# Altium PCB pcb1 (2).PcbDoc
Units mm, origin at the board's own origin, x right, y up, seen from the top; angles counter-clockwise.
Board outline 70.46 x 68.3 mm, 2 copper layers (Top Layer, Bottom Layer); 42 components, 43 nets, 233 pads, 95 vias.
Unrouted connection lines stored in the file: 142.
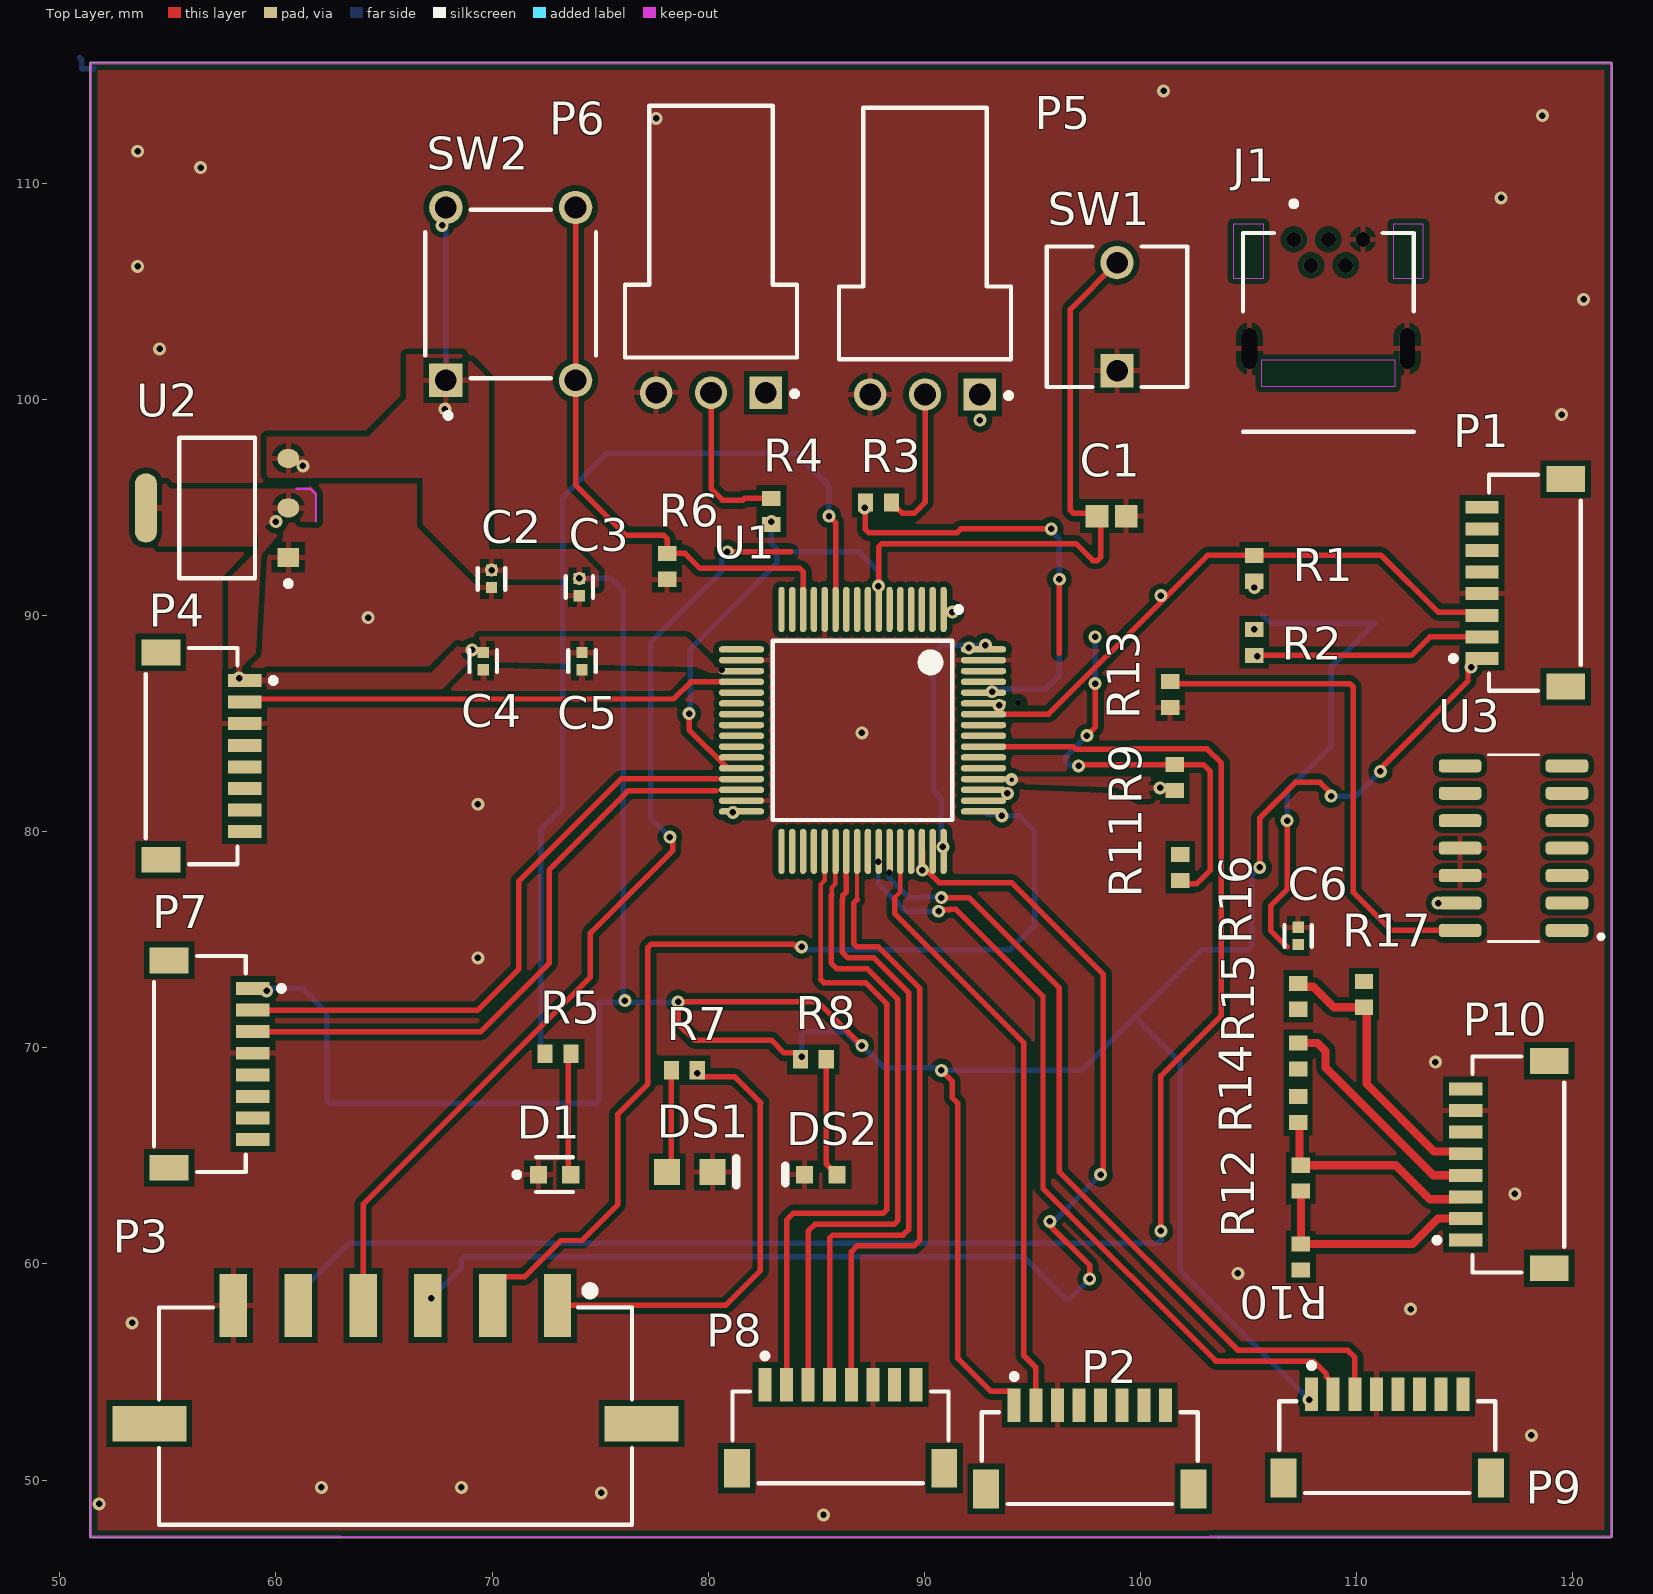
[diagram p0: Top Layer view]
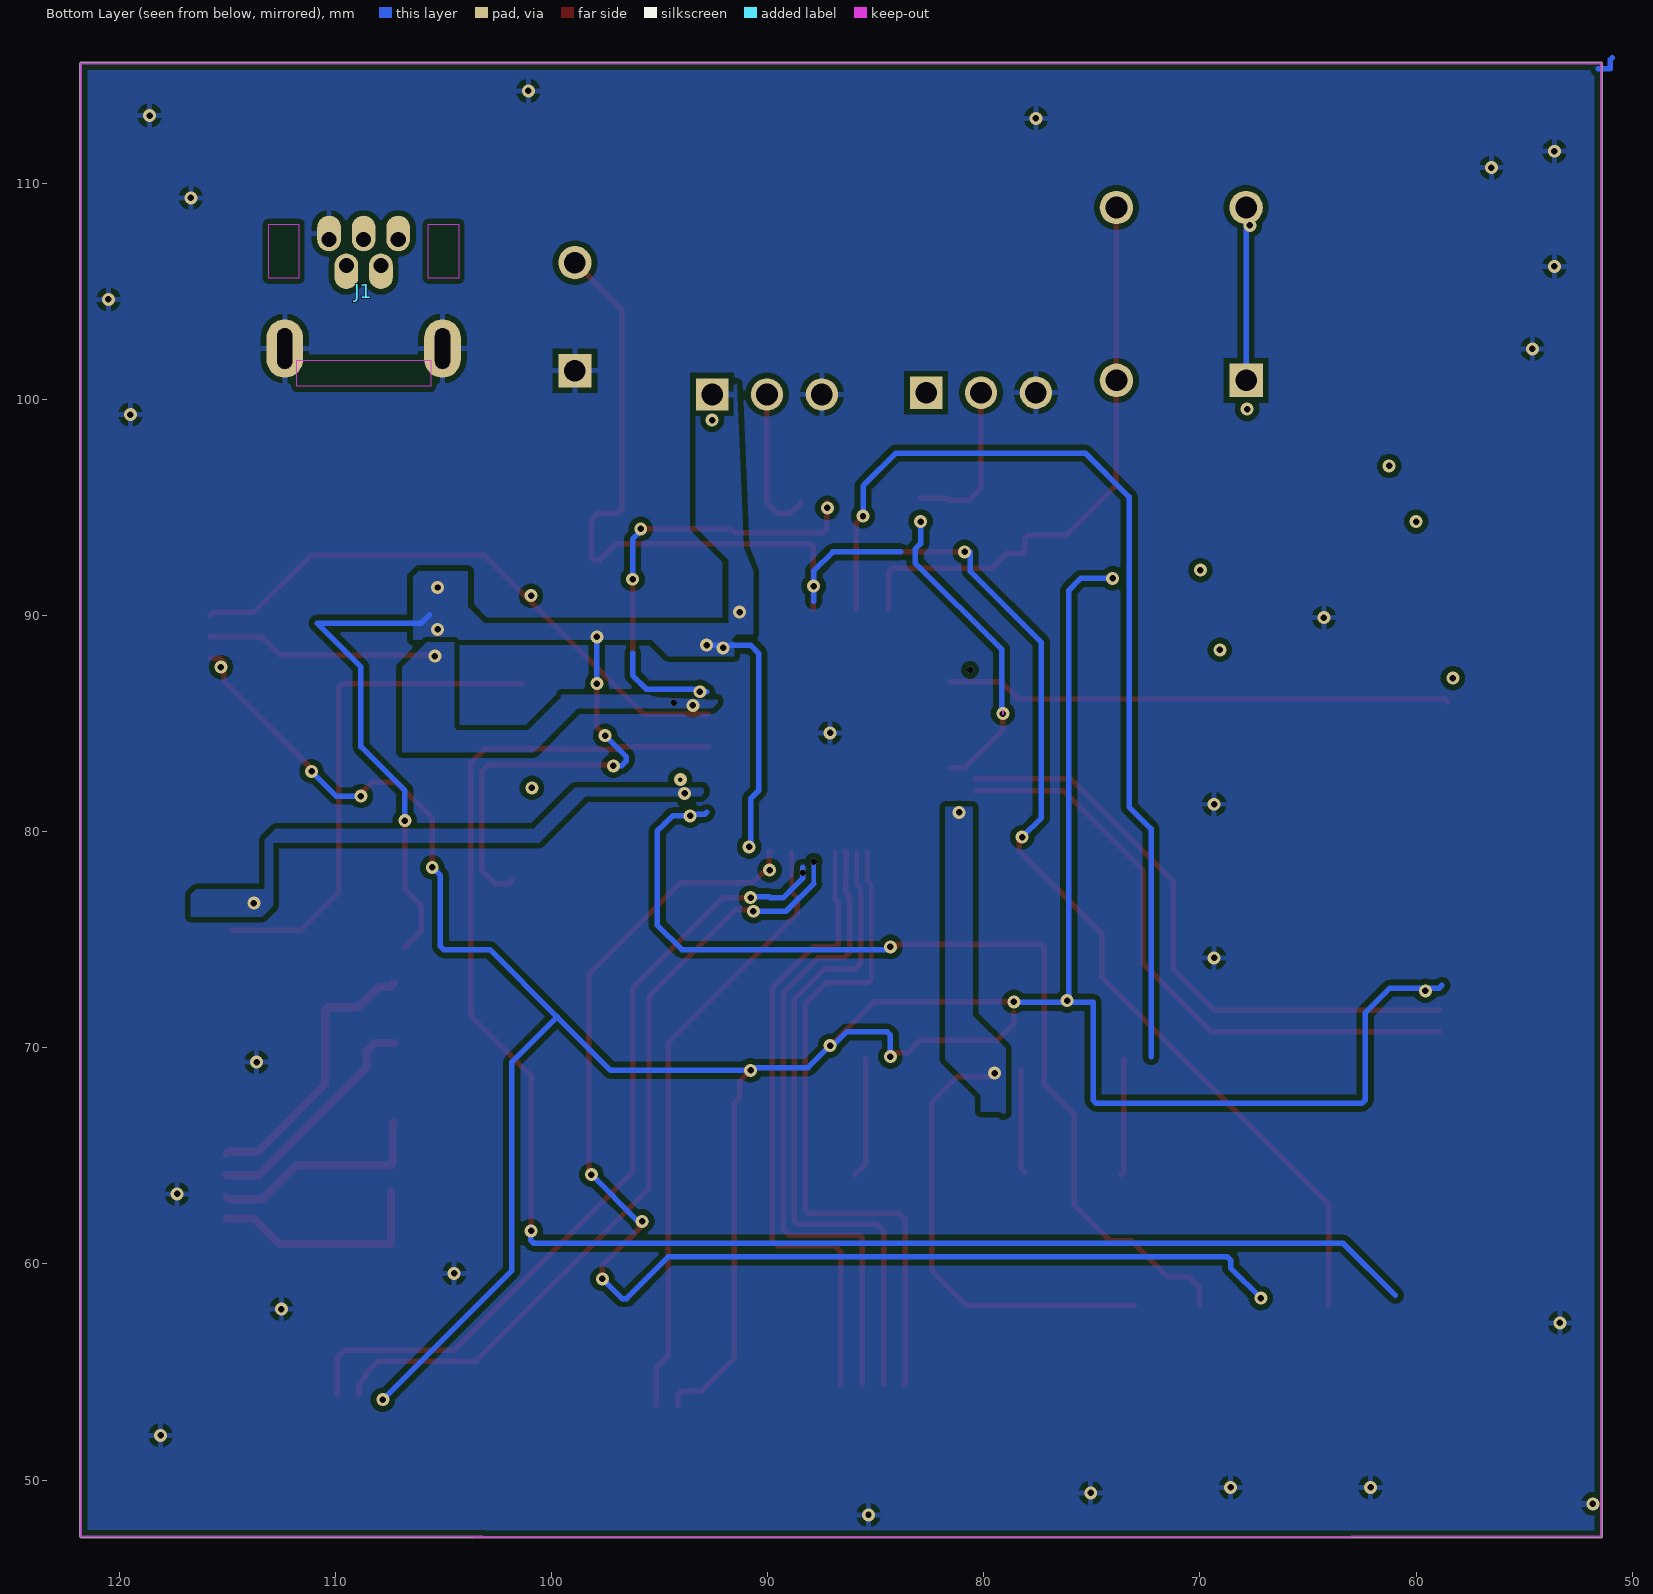
[diagram p1: Bottom Layer view, seen from below]
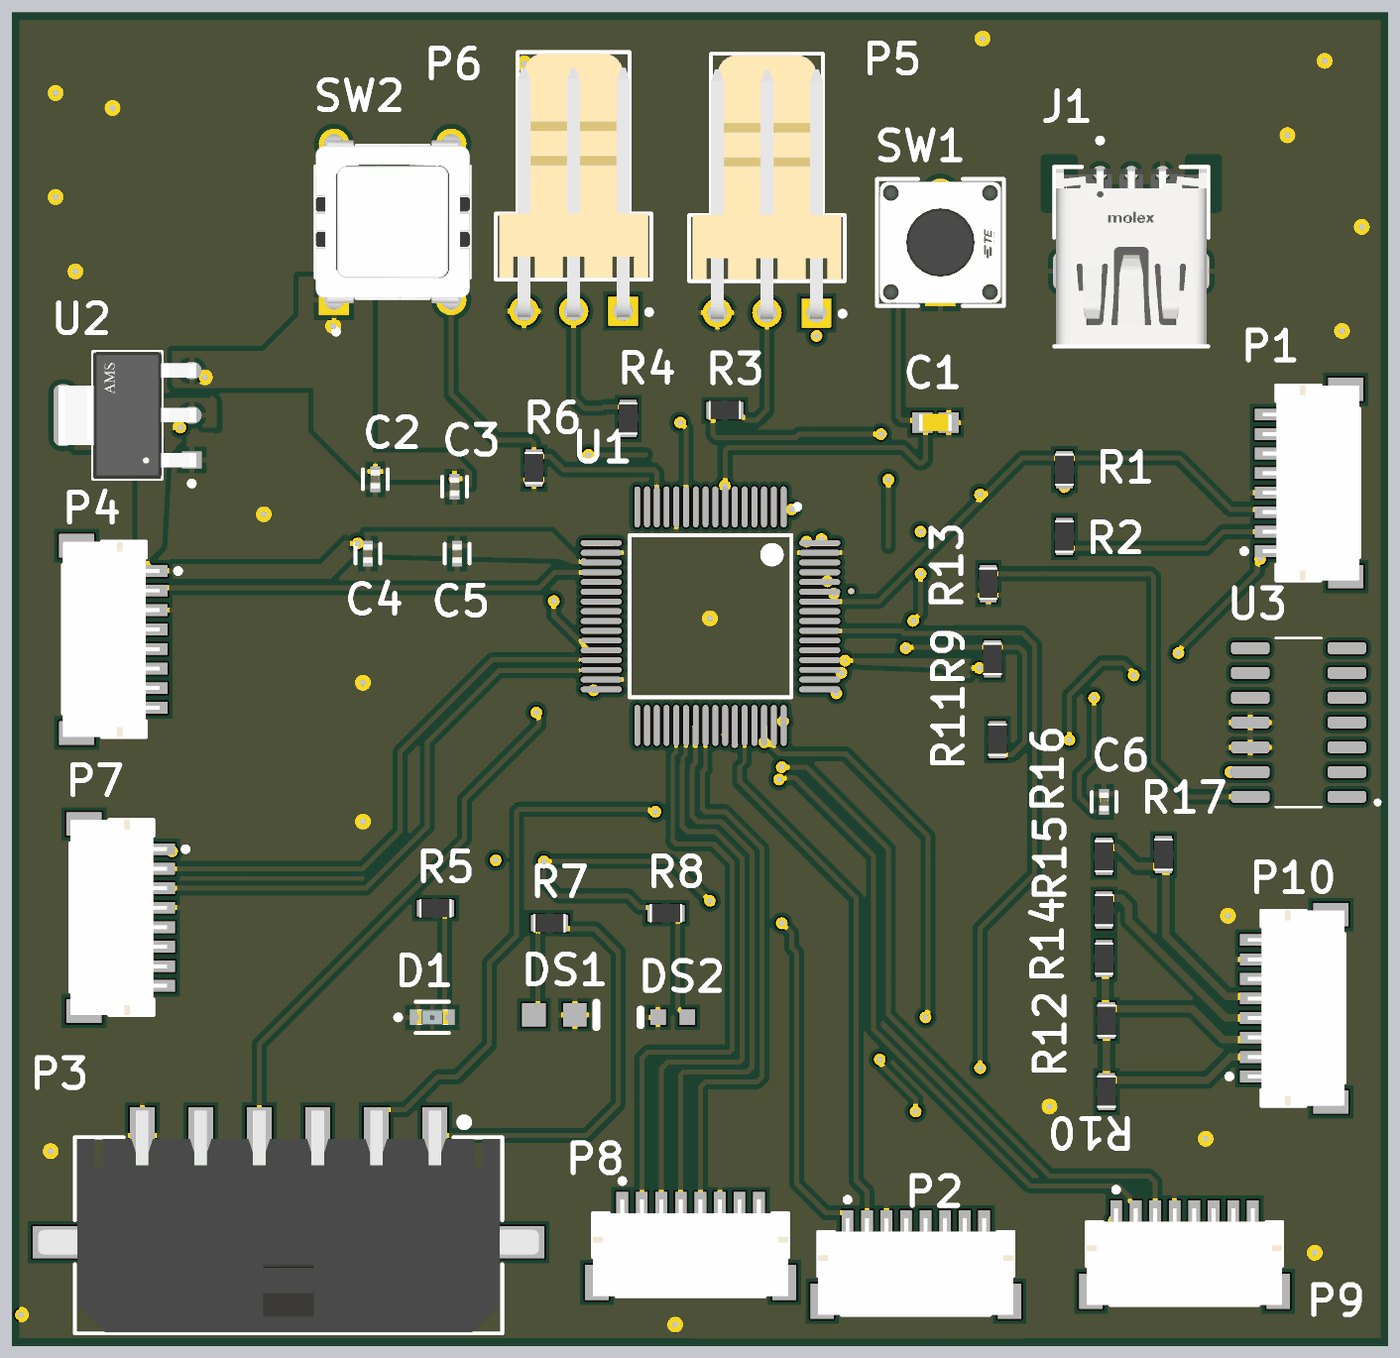
[diagram p2: 3D render of the assembled board from above, using the file's embedded part models]

## Layer stack, top to bottom
Top Solder: solder mask 0.0102, Solder Resist, Dk 3.5
Top Layer: signal copper 0.0356
Dielectric 1: dielectric 0.32, FR-4, Dk 4.8
Bottom Layer: signal copper 0.0356
Bottom Solder: solder mask 0.0102, Solder Resist, Dk 3.5

## Board outline
51.385,47.376 ccw(c51.435,47.376) 51.435,47.326 62.989,47.326 103.634,47.316 ccw(c103.634,47.366) 103.676,47.337 121.793,47.337 ccw(c121.793,47.388) 121.843,47.388 121.843,115.57 ccw(c121.793,115.57) 121.793,115.62 104.87,115.62 67.85,115.62 51.436,115.62 ccw(c51.435,115.57) 51.385,115.57 51.385,64.809

## Design rules (kind name [scope] priority, off if disabled: settings)
Clearance [All] p1: gap=0.254 ignorepadtopadclearanceinfootprint=FALSE except(0: Arc-Hole Track-Hole SMDPad-Hole THPad-Hole Via-Hole Fill-Hole Poly-Hole Region-Hole Text-Hole)
DiffPairsRouting [All] p1: maxlimit=0.254 minlimit=0.254 mostfreqgap=0.254 toplayer_minwidth=0.381 toplayer_maxwidth=0.381 toplayer_prefwidth=0.381 bottomlayer_minwidth=0.381 bottomlayer_maxwidth=0.381 bottomlayer_prefwidth=0.381 maxuncoupledlength=12.7
PolygonConnect [All] p1: connectstyle=Relief reliefconductorwidth=0.254 reliefentries=4 polygonreliefangle="90 Angle" airgapwidth=0.254
RoutingVias [All] p1: holewidth=0.711 width=1.27 viastyle="Through Hole" minholewidth=0.711 minwidth=1.27 maxholewidth=0.711 maxwidth=1.27
SolderMaskExpansion [All] p1: expansion=0.102 istentingtop=FALSE
Width [All] p1: maxlimit=0.254 minlimit=0.254 preferedwidth=0.254
29 further rules are at their usual default settings.

## Classes and differential pairs
differential pair class diff103: RS485_OUTPUT
differential pair class diff102: RS485_INPUT
component class Sheet2: C2 C3 C4 C5 C6 J1 P7 P8 P9 P10 R9 R10 R11 R12 R13 R14 R15 R16 R17 U2 U3
component class Sheet1: C1 D1 DS1 DS2 P1 P2 P3 P4 P5 P6 R1 R2 R3 R4 R5 R6 R7 R8 SW1 SW2 U1
differential pair RS485_OUTPUT: +RS485_OUTPUT_P -RS485_OUTPUT_N
differential pair RS485_INPUT: +RS485_INPUT_P -RS485_INPUT_N

## Components (designator, comment, footprint, x,y, rotation, side; value= is the part's Value field where it differs from the comment)
C1 "CC0603JRNPO9BN101" CAPC1608X90X40ML10T20 98.679,94.615 r180 top
C2 "100nF" FP-C0402-BB-MFG 69.977,91.713 r270 top value="0.10 μF"
C3 "10nF" FP-C0402-BB-MFG 74.041,91.332 r270 top value="0.10 μF"
C4 "10nF" FP-C0402-BB-MFG 69.596,87.903 r270 top value="0.10 μF"
C5 "100nF" FP-C0402-BB-MFG 74.168,87.903 r270 top value="0.10 μF"
C6 "100nF" FP-C0402-BB-MFG 107.315,75.184 r90 top value="0.10 μF"
D1 "LTST-C191TBKT" FP-LTST-C191TBKT-MFG 72.898,64.135 r0 top
DS1 "HSMG-C170" AVAG-HSMX-C170_V 79.155,64.262 r0 top
DS2 "HSMH-C190" AVAG-HSMX-C190_V 85.217,64.135 r180 top
J1 "54819-0519" FP-54819-0519-MFG 108.712,103.124 r0 top
P1 "SM08B-SRSS-TB(LF)(SN)" JST-SM08B-SRSS-TB_V 118.274,91.527 r90 top
P2 "SM08B-SRSS-TB(LF)(SN)" JST-SM08B-SRSS-TB_V 97.671,51.017 r0 top
P3 "662106145021" 662106145021 65.532,52.959 r0 top
P4 "SM08B-SRSS-TB(LF)(SN)" JST-SM08B-SRSS-TB_V 56.097,83.51 r270 top
P5 "61900311021" 61900311021 90.043,107.696 r180 top
P6 "61900311021" 61900311021 80.137,107.78 r180 top
P7 "SM08B-SRSS-TB(LF)(SN)" JST-SM08B-SRSS-TB_V 56.478,69.255 r270 top
P8 "SM08B-SRSS-TB(LF)(SN)" JST-SM08B-SRSS-TB_V 86.132,51.971 r0 top
P9 "SM08B-SRSS-TB(LF)(SN)" JST-SM08B-SRSS-TB_V 111.435,51.525 r0 top
P10 "SM08B-SRSS-TB(LF)(SN)" JST-SM08B-SRSS-TB_V 117.512,64.603 r90 top
R1 "10k" RESC1609X50X30LL8T20 105.283,92.202 r270 top
R2 "10k" RESC1609X50X30LL8T20 105.283,88.773 r270 top
R3 "10k" RESC1609X50X30LL8T20 87.884,95.25 r0 top
R4 "10k" RESC1609X50X30LL8T20 82.931,94.834 r90 top
R5 "10k" RESC1609X50X30LL8T20 73.06,69.723 r0 top
R6 "10k" RESC1609X50X30LL8T20 78.105,92.294 r90 top
R7 "10k" RESC1609X50X30LL8T20 78.902,68.961 r180 top
R8 "10k" RESC1609X50X30LL8T20 84.871,69.469 r0 top
R9 "10k" RESC1609X50X30LL8T20 101.6,82.515 r90 top
R10 "10k" RESC1609X50X30LL8T20 107.442,60.325 r90 top
R11 "10k" RESC1609X50X30LL8T20 101.854,78.359 r90 top
R12 "120R" RESC1609X50X30LL8T20 107.442,63.973 r270 top
R13 "10k" RESC1609X50X30LL8T20 101.39,86.36 r90 top
R14 "10k" RESC1609X50X30LL8T20 107.315,67.148 r270 top
R15 "10k" RESC1609X50X30LL8T20 107.315,69.631 r90 top
R16 "120R" RESC1609X50X30LL8T20 107.315,72.39 r270 top
R17 "10k" RESC1609X50X30LL8T20 110.363,72.482 r270 top
SW1 "FSM2JART" FP-FSM2JART-MFG 98.933,103.848 r90 top
SW2 "ESE20C321" FP-ESE20C321-MFG 70.866,104.902 r90 top
U1 "STM32F107RCT6" STM-LQFP64_M 87.15,84.697 r270 top
U2 "AMS1117-3.3" FP-AMS1117-IPC_C 57.277,94.996 r180 top
U3 "SN65HVD1473D" SOIC127P600X175-14N 117.283,79.248 r180 top

## Footprints (in the part's own frame and the unit in brackets; to place one, negate y for a bottom-side part, rotate by r counter-clockwise, add the part's x,y. Pads: shape width x height; smd on the part's side, far side on the other; paste and mask are expansions set on the pad)
61900311021 [mm] "2.54mm Male Left Angled Header Bottom Locking, 3p"
  rect 1.5x1.5 hole 1: 1(-2.54,7.45)
  round 1.5 hole 1: 2(0,7.45) 3(2.54,7.45)
  silkscreen extent -4,-5.82 3.98,7.62, body extent -3.81,-5.75 3.81,7.77, height 5.83
662106145021 [mm] "3.00mm Male Single Row Angled Header, 6p"
  rect 1.27x2.92 smd: 1(7.5,5.12) 2(4.5,5.12) 3(1.5,5.12) 4(-1.5,5.12) 5(-4.5,5.12) 6(-7.5,5.12)
  rect 3.43x1.65 smd: MP1(-11.395,-0.35) MP2(11.395,-0.35)
  silkscreen extent -10.95,-5.02 10.95,6, body extent -12.82,-4.95 12.82,6.4, height 5.61
AVAG-HSMX-C170_V [mm] "SMD, 2-Leads, Body 2x1.25mm, Height 0.8mm"
  rect 1.2x1.2 smd: 1(-1.05,0) 2(1.05,0)
  silkscreen extent 2.15,-0.63 2.15,0.63, body extent -1,-0.63 1,0.63, height 0.8
AVAG-HSMX-C190_V [mm] "SMD, 2-Leads, Body 1.6x0.8mm, Height 0.9mm"
  rect 0.8x0.8 smd: 1(-0.75,0) 2(0.75,0)
  silkscreen extent 1.65,-0.4 1.65,0.4, body extent -0.8,-0.4 0.8,0.4, height 0.9
CAPC1608X90X40ML10T20 [mm] "Chip Capacitor, 2-Leads, Body 1.7x0.9mm, IPC Low Density"
  rect 1.05x1.05 smd: 1(-0.675,0) 2(0.675,0)
  body extent -0.85,-0.45 0.85,0.45, height 0.9
FP-54819-0519-MFG [mm]
  rrect100% 1.1x1.65 smd far side paste-1000 mask+0: 1(-1.6,4.575) 2(-0.8,2.825) 3(0,4.575) 4(0.8,2.825) 5(1.6,4.575)
  rrect100% 0.7x1.9 hole 1.9 slot 0.7 at 0 deg paste-1000 mask+0: 6(-3.65,-0.75) 7(3.65,-0.75)
  rrect100% 1.7x2.7 smd far side paste-1000 mask+0: 6(-3.65,-0.75) 7(3.65,-0.75)
  Keep-Out Layer region: 3,2.5 4.4,2.5 4.4,5 3,5
  Keep-Out Layer region: -4.4,2.5 -3,2.5 -3,5 -4.4,5
  Keep-Out Layer region: -3.1,-2.5 3.1,-2.5 3.1,-1.3 -3.1,-1.3
  silkscreen extent -3.95,-4.6 3.95,6.07, body extent -4.6,-4.7 4.6,5.5, height 0.25
FP-AMS1117-IPC_C [mm]
  rect 1.004x0.872 smd paste+0 mask+0: 1(-3.295,2.29)
  rrect100% 1.004x0.872 smd paste+0 mask+0: 2(-3.295,0) 3(-3.295,-2.29)
  rrect87% 1.004x3.182 smd paste+0 mask+0: 4(3.295,0)
  silkscreen extent -3.42,-3.25 1.75,3.62, body extent -3.9,-3.35 3.9,3.35, height 0.25
FP-C0402-BB-MFG [mm]
  rect 0.52x0.52 smd paste+0 mask+0: 1(-0.4,0) 2(0.4,0)
  silkscreen extent -0.5,-0.64 0.5,0.64, body extent -0.8,-0.4 0.8,0.4, height 0.25
FP-ESE20C321-MFG [mm]
  rect 1.55x1.55 hole 1 paste-1000 mask+0: A(-4,3)
  round 1.55 hole 1 paste-1000 mask+0: B(-4,-3) C(4,3) D(4,-3)
  silkscreen extent -5.75,-3.95 3.9,3.95, body extent -4.87,-4.05 4.87,4.05, height 0.25
FP-FSM2JART-MFG [mil]
  rect 60.65x60.65 hole 39 paste-39370.1 mask+0: 1(-98.5,0)
  round 60.65 hole 39 paste-39370.1 mask+0: 2(98.5,0)
  silkscreen extent -128,-128 128,128, body extent -133,-132 133,132, height 10
FP-LTST-C191TBKT-MFG [mm]
  rect 0.8x0.8 smd paste+0 mask+0: 1(-0.75,0) 2(0.75,0)
  silkscreen extent -1.87,-0.8 0.85,0.8, body extent -1.25,-0.55 1.25,0.55, height 0.25
JST-SM08B-SRSS-TB_V [mm] "SMD, 8-Leads, Body 10x4.25mm, Pitch 1mm"
  rect 0.6x1.55 smd: 1(-3.5,2.45) 2(-2.5,2.45) 3(-1.5,2.45) 4(-0.5,2.45) 5(0.5,2.45) 6(1.5,2.45) 7(2.5,2.45) 8(3.5,2.45)
  rect 1.2x1.8 smd: MP1(-4.8,-1.425) MP2(4.8,-1.425)
  silkscreen extent -5,-2.12 5,3.9, body extent -5,-2.12 5,2.83, height 2.96
RESC1609X50X30LL8T20 [mm] "Chip Resistor, 2-Leads, Body 1.65x0.95mm, IPC High Density"
  rect 0.7x0.85 smd: 1(-0.6,0) 2(0.6,0)
  body extent -0.82,-0.48 0.82,0.48, height 0.5
SOIC127P600X175-14N [mm]
  rrect50% 1.97x0.6 smd: 1(-2.475,3.81) 2(-2.475,2.54) 3(-2.475,1.27) 4(-2.475,0) 5(-2.475,-1.27) 6(-2.475,-2.54) 7(-2.475,-3.81) 8(2.475,-3.81) 9(2.475,-2.54) 10(2.475,-1.27) 11(2.475,0) 12(2.475,1.27) 13(2.475,2.54) 14(2.475,3.81)
  silkscreen extent -4.15,-4.33 1.17,4.33
STM-LQFP64_M [mm] "Thin QFP, 64-Leads, Body 10x10mm, Pitch 0.5mm, IPC Low Density"
  oval 2.1x0.3 smd: 1(-5.6,3.75) 2(-5.6,3.25) 3(-5.6,2.75) 4(-5.6,2.25) 5(-5.6,1.75) 6(-5.6,1.25) 7(-5.6,0.75) 8(-5.6,0.25) 9(-5.6,-0.25) 10(-5.6,-0.75) 11(-5.6,-1.25) 12(-5.6,-1.75) 13(-5.6,-2.25) 14(-5.6,-2.75) 15(-5.6,-3.25) 16(-5.6,-3.75) 33(5.6,-3.75) 34(5.6,-3.25) 35(5.6,-2.75) 36(5.6,-2.25) 37(5.6,-1.75) 38(5.6,-1.25) 39(5.6,-0.75) 40(5.6,-0.25) 41(5.6,0.25) 42(5.6,0.75) 43(5.6,1.25) 44(5.6,1.75) 45(5.6,2.25) 46(5.6,2.75) 47(5.6,3.25) 48(5.6,3.75)
  oval 0.3x2.1 smd: 17(-3.75,-5.6) 18(-3.25,-5.6) 19(-2.75,-5.6) 20(-2.25,-5.6) 21(-1.75,-5.6) 22(-1.25,-5.6) 23(-0.75,-5.6) 24(-0.25,-5.6) 25(0.25,-5.6) 26(0.75,-5.6) 27(1.25,-5.6) 28(1.75,-5.6) 29(2.25,-5.6) 30(2.75,-5.6) 31(3.25,-5.6) 32(3.75,-5.6) 49(3.75,5.6) 50(3.25,5.6) 51(2.75,5.6) 52(2.25,5.6) 53(1.75,5.6) 54(1.25,5.6) 55(0.75,5.6) 56(0.25,5.6) 57(-0.25,5.6) 58(-0.75,5.6) 59(-1.25,5.6) 60(-1.75,5.6) 61(-2.25,5.6) 62(-2.75,5.6) 63(-3.25,5.6) 64(-3.75,5.6)
  silkscreen extent -5.72,-4.15 4.15,4.58, body extent -5,-5 5,5, height 1.6

## Part data
C1: library part CMP-2100-03594-1, "Chip Capacitor, 100 pF, +/- 5%, 50 V, -55 to 125 degC, 0603 (1608 Metric), RoHS, Tape and Reel", Capacitance=100pF, Case Code (Metric)=1608, Case Code (Imperial)=0603, Dielectric=C0G, Manufacturer=Yageo, Max Operating Temperature=125degC, Min Operating Temperature=-55degC, Package Description="2-Pin Surface Mount Device, Body 1.6 x 0.8 mm", Package Quantity=1, Temperature Coefficient=30ppm/degC, Tolerance=5%, Voltage=50V, Insulation Resistance=100GR, Case/Package=0603, Composition=Ceramic, Datasheet URL=http://www.yageo.com/documents/recent/UPY-GP_NP0_16V-to-50V_14.pdf, Datasheet Version="Rev. 14, 07/2016", Depth=0.8mm, Height=0.8mm, Lead Free=LeadFree, Length=1.6mm, Manufacturer URL=http://www.yageo.com/, Mount=SurfaceMount, Number of Pins=2, Package Reference=0603, Packaging=TapeandReel, Radiation Hardening=No, REACH SVHC=Unknown, RoHSCompliant=True, Termination=SMD/SMT, Thickness=0.035inch, Voltage Rating=50V, Voltage Rating (DC)=50V, Width=0.8mm
C2 C3 C4 C5 C6: library part CMP-2008-02046-2, "CAP CER 0.1UF 10V X5R 0402", Capacitance="0.10 μF", Manufacturer=Kemet, Manufacturer Part Number=C0402C104K8PACTU, Package=C0402-BB, Temperature="-55°C to +125°C", Temperature Characteristic=X5R, Temperature Coefficient=15%, Temperature Range High=+125°C, Temperature Range Low=-55°C, Tolerance=0.1, Voltage Rating="10 V", Automotive=No, Category=Cap, ComponentLink2Description=Datasheet, ComponentLink2URL=https://content.kemet.com/datasheets/KEM_C1002_X7R_SMD.pdf, Device Class L1="Passive Components", Device Class L2=Capacitors, Device Class L3="Ceramic Capacitors", Digikey Description="CAP CER 0.1UF 10V X5R 0402", Height=0.55mm, Lead Free=Yes, Material=Ceramic, Mouser Description="Capacitor 100 nF 10 VDC 0402", Octopart=https://octopart.com/c0402c104k8pactu-kemet-140039, RoHS=TRUE, Ipc Land Pattern Name=CAPC10050X50
D1: library part CMP-22017-000008-1, "LED BLUE CLEAR CHIP SMD", Case Code (Metric)=1608, Case Code (Imperial)=0603, Color=Blue, Forward Current=20mA, Forward Voltage=3.8V, Lens Color=Colorless, Max Operating Temperature=80°C, Max Power Dissipation=75mW, Min Operating Temperature=-20°C, Package Quantity=1, Power Dissipation=76mW, Reverse Voltage=5V, Case/Package=0603, Depth=1.6mm, Dominant Wavelength=475nm, Height=0.55mm, Lead Free="Lead Free", Length=0.8mm, Lens Style=Diffused, Lens Transparency=Clear, Luminous Intensity=180mcd, Mount="Surface Mount", Number of Elements=1, Number of LEDs=1, Number of Pins=2, Packaging="Tape and Reel", Radiation Hardening=No, Test Current=20mA, Viewing Angle=130°, Wavelength=468nm, Width=0.8mm, Illumination Color=Blue
DS1: library part CMP-2000-05062-1, "Chip LED, Green, 2.2 V, -40 to 85 degC, 2-Pin SMD, Pb-Free, Tape and Reel", Forward Current If=20mA, Forward Voltage=2.2V, Forward Voltage VF Max=2.6V, LED Colour=Green, Manufacturer=Avago, Operating Temperature Max=85degC, Operating Temperature Min=-30degC, Operating Temperature Range=-30degCto+85degC, Opto Case Style=SMD, Package Description="2-Pin Surface Mount Device, Body 2 x 1.25 mm, Height 0.8 mm", Package Reference=HSMX-C170, Storage Temperature Min=-40degC, Bulb Size=1.25mmx1.4mm, Datasheet URL=https://datasheet.ciiva.com/29280/180495-da-01-en-chip-led-hsmg-c170-gelb-gruen-29280971.pdf, Datasheet Version=Oct-08, Dominant Wavelength=572nm, Dominant Wavelength Typ=572nm, External Depth=0.8mm, External Length / Height=2mm, External Width=1.25mm, Forward Current If Max=20mA, LED Mounting=SMD, LED Type=Standard, Lens Shape=Rectangular, Light Area Height=1mm, Luminous Intensity=15mcd, Luminous Intensity Min=4mcd, Luminous Intensity Typ=15mcd, Manufacturer URL=http://www.avagotech.com/, Mounting Type=SMD, MSL=MSL2A-4weeks, No. of Pins=2, Opto Mounting Orientation=Top, Packaging=CutTape, Peak Forward Current=20mA, Peak Wavelength=570nm, PIV Max=5V, Storage Temperature Max=85degC, SVHC=NoSVHC(16-Jun-2014), Viewing Angle=170deg, Voltage Vf Typ=2.2V, Wavelength Typ=570nm
DS2: library part CMP-1744-00004-1, "LED Uni-Color Red, 65 mW, 20 mA, -40 to 85 degC, 2-Pin SMD, RoHS, Tape and Reel", Current Rating="1 A", Max Operating Temperature="85 degC", Min Operating Temperature="-30 degC", Package Quantity=2000, ComponentLink1Description="Manufacturer URL", ComponentLink1URL=http://www.avagotech.com/, ComponentLink2Description=Datasheet, ComponentLink2URL=http://docs.avagotech.com/docs/AV02-0551EN, ComponentLink3Description="Package Specification", ComponentLink3URL=http://www.fairchildsemi.com/dwg/MA/MA03D.pdf, Connector Type=USB, Contact Material=Copper, Contact Plating=Gold, DatasheetVersion=Mar-12, Gender=Male, Height="2.8 mm", Lead Pitch="0.65 mm", Length="7.5 mm", Mount="Surface Mount", PackageDescription="2-Pin Surface Mount Device, Body 1.6 x 0.8 mm, Height 0.9 mm", PackageReference=HSMX-C190, Packaging="Tape and Reel", Pins=5, REACH SVHC="No SVHC", RoHSCompliant=true, Width="5.6 mm"
J1: library part CMP-04767-000009-1, "CONN RCPT USB2.0 MINI B 5P R/A", Color=Black, Contact Resistance=50mR, Current Rating=1A, Flammability Rating="UL94 V-0", Max Operating Temperature=50°C, Min Operating Temperature=0°C, Package Quantity=3600, Voltage Rating=30V, Insulation Resistance=100MR, Connector Type=USB, Contact Material="Copper Alloy", Contact Plating=Gold, Data Rate=480Mbps, Depth=9mm, Features=Shielded, Gender=Receptacle, Housing Color=Black, Housing Material=Polyamide, Lead Free="Lead Free", Length=7.7mm, Max Current Rating=1A, Mount="Through Hole", Number of Circuits=5, Number of Contacts=5, Number of Ports=1, Number of Positions=5, Number of Rows=1, Number of Terminals/Pins=5, Orientation="Right Angle", Packaging=Tray, Pitch=0.8mm, Radiation Hardening=No, Series=54819, Termination=Solder, USB Standard="USB 2.0", Voltage Rating (DC)=30V, Width=6.9mm, Working Voltage=30V
P1 P2 P4 P7 P8 P9 P10: library part CMP-2000-07082-1, "Male Header, Pitch 1 mm, 1 x 8 Position, Height 2.95 mm, -25 to 85 degC, RoHS, Tape and Reel", Manufacturer=JST, Package Description="Male Header, Pitch 1 mm, 1 x 8 Position, Height 2.95 mm", Package Reference=SM08B-SRSS-TB, Datasheet URL=http://www.jst-mfg.com/product/pdf/eng/eSR.pdf, Datasheet Version=11/2010, Manufacturer URL=http://www.jst.com/home2.html, Mounting Technology=SurfaceMount, No of Positions=8, Pitch=1mm, Style/Orientation=RightAngleHeader/Plug, Termination=Crimp, Type=ShroudedHeader
P3: library part CMP-1502-00486-1, "SMT Male Header WR-MPC3, with SMT Solder Tabs, Right Angled, Single Row, pitch 3 mm, 6 pins", Contact Resistance=10mOhm, Manufacturer="Wurth Elektronik", Operating Temperature=-40to105degC, Working Voltage=250VAC, Datasheet URL=https://katalog.we-online.de/em/datasheet/6621xx145021.pdf, Gender=Male, Manufacturer URL=http://www.we-online.de, Mounting Technology=SMT, Orientation=RightAngled, Package Reference=662106145021, Packaging=TapeandReel, Part Number=662106145021, Pin Number=6, Pitch=3mm, Publisher=WurthElektronik
P5 P6: library part CMP-1502-00593-1, "Male Bottom Locking Header WR-WTB, THT, Right Angled, pitch 2.54 mm, 1 x 3 position", Contact Resistance=20mOhm, Manufacturer="Wurth Elektronik", Operating Temperature=-40to105degC, Working Voltage=250VAC, Datasheet URL=https://katalog.we-online.de/em/datasheet/6190xx11021.pdf, Gender=Male, Manufacturer URL=http://www.we-online.de, Mounting Technology=THT, Orientation=RightAngled, Package Reference=61900311021, Packaging=Bag, Part Number=61900311021, Pitch=2.54mm, Position=1x3, Publisher=WurthElektronik
R1 R2 R3 R4 R5 R6 R7 R8 R9 R10 R11 R12 R13 R14 R15 R16 R17: library part CMP-1666-00005-4, "Chip Resistor, 10 KOhm, +/- 1%, 100 mW, -55 to 155 degC, 0603 (1608 Metric), RoHS, Tape and Reel", Manufacturer="Vishay Semiconductor", Max Operating Temperature="155 degC", Min Operating Temperature="-55 degC", Package Quantity=5000, Voltage Rating="75 V", ComponentLink1Description="Manufacturer URL", ComponentLink1URL=http://www.vishay.com/, ComponentLink2Description=Datasheet, ComponentLink2URL=https://datasheet.ciiva.com/11809/0900766b80d98afc-11809037.pdf, DatasheetVersion=06/2012, Height="0.45 mm", Length="1.55 mm", Mounting Technology="Surface Mount", PackageDescription="2-Pin Surface Mount Device, Body 1.575 x 0.85 mm", PackageReference=0603, Packaging="Tape and Reel", REACH SVHC=Unknown, RoHSCompliant=true
SW1: library part CMP-03407-000009-1, "SWITCH TACTILE SPST-NO 0.05A 12V", Contact Current Rating=50mA, Contact Resistance=100mR, Max Operating Temperature=105°C, Max Voltage Rating (DC)=12V, Min Operating Temperature=-35°C, Operating Force=260gf, Package Quantity=1000, Actuator Length=0.7mm, Actuator Material=Resin, Actuator Type=Standard, Contact Material="Copper Alloy", Contact Plating=Silver, Current Rating=50mA, Electrical Life=100000Cycles, ELV=Compliant, Lead Free="Lead Free", Mount="Through Hole", Orientation=Straight, Packaging="Tape and Reel", REACH SVHC="No SVHC", RoHS Compliant=Yes, Series=FSMJRT, Switch Function=Off-Mom, Termination=Solder, Throw Configuration=SPST, Type=Switch, Voltage Rating (DC)=12V, Illumination Type=Non-Illuminated
SW2: library part CMP-05613-000002-1, "SWITCH PUSH SPST-NO 0.1A 14V", Contact Current Rating=100mA, Max Operating Temperature=80°C, Max Voltage Rating (DC)=14V, Min Operating Temperature=-30°C, Operating Force=4N, Package Quantity=1200, Actuator Type="Square, Button", Current Rating=100mA, Lead Free="Lead Free", Mount="Through Hole", Orientation=Straight, Packaging=Bulk, Radiation Hardening=No, REACH SVHC="No SVHC", RoHS Compliant=Yes, Series=ESE20C, Switch Function=Off-Mom, Termination="PC Pin", Throw Configuration=SPST, Voltage Rating (DC)=14V
U1: library part CMP-0237-00079-3, "ARM Cortex-M3 32-bit MCU, 256 KB Flash, 64 KB Internal RAM, 51 I/Os, 64-pin LQFP, -40 to 85 degC, Tray", Operating Frequency(F) (Processor speed) (MHz)=72, Supply Voltage(Vcc) min (V)=2, I/Os (High Current)=51, A/D Converter="2x12-bit (16 Channel)", ComponentLink1Description="Manufacturer URL", ComponentLink1URL=http://www.st.com/web/en/home.html, ComponentLink2Description=Datasheet, ComponentLink2URL=http://www.st.com/st-web-ui/static/active/en/resource/technical/document/datasheet/CD00220364.pdf, ComponentLink3Description="Package Specification", ComponentLink3URL=http://www.st.com/st-web-ui/static/active/en/resource/technical/document/datasheet/DM00037051.pdf, Core="ARM Cortex-M3", D/A Converter="2x12-bit (2 Channel)", DatasheetVersion="Rev. 6", FLASH Size (Prog) (kB)=256, Mounting Technology="Surface Mount", PackageDescription="64-Pin Low Profile Quad Flat Package, 10 x 10 mm Body, 0.5 mm Pitch", PackageReference=LQFP64, PackageVersion="Rev. 4, 06/2013", Packing=Tray, PartNumber=STM32F107RCT6, Internal RAM Size (kB)=64
U2: library part CMP-209535-000001-1, "LDO Voltage Regulators 1A, 3.3V", Dropout Voltage=1.1V, Manufacturer="Advanced Monolithic Systems", Max Junction Temp=+125°C, Max Power Dissipation=1.2W, Max Supply Voltage=15V, Nominal Supply Current=5mA, Output Current=1A, Output Voltage=3.3V, Package=AMS1117, Temperature="-40°C to +125°C", Temperature Range Low=-40°C, Automotive=No, Category=IC, ComponentLink2Description=Datasheet, ComponentLink2URL=http://www.advanced-monolithic.com/pdf/ds1117.pdf, Device Class L1="Integrated Circuits (ICs)", Device Class L2="Power Management ICs", Device Class L3="Voltage Regulators - Linear", Height=1.8mm, Lead Free=Yes, Manufacturer Part Number=AMS1117-3.3, Number Of Outputs=1, Octopart=https://octopart.com/ams1117-3.3-advanced+monolithic+systems-25899300, Output Type=Fixed, RoHS=TRUE, Standoff Height=0.64mm, Temperature Range High=+125°C, Ipc Land Pattern Name=SOT229P700X180-4

## Via types
v1: diameter 0.6, hole 0.3, Top Layer to Bottom Layer, 85 vias
v2: diameter 0.7, hole 0.7, Top Layer to Bottom Layer, 5 vias
v3: diameter 0.3, hole 0.3, Top Layer to Bottom Layer, 4 vias
v4: diameter 0.6, hole 0.2, Top Layer to Bottom Layer, 1 vias

## Nets (pads, with @x,y where several pads share a name; then routed paths per layer and width w, separated by ;. In a path a pad name is that pad's centre, name@x,y a point inside that pad or via, vN(x,y) a via of type N, cw(c..) or ccw(c..) an arc to the next point about the centre after c; other vN are vias at no path point)
3.3V: R9.2 R11.1 | length 16.9
  Top Layer w0.254: v1(97.155,83.058) 97.212,83.115 R9.2 102.94,83.115 103.251,82.804 103.251,78.232 102.616,77.597 102.016,77.597 R11.1 ; 97.663,84.582 97.917,84.836 97.917,86.868
  Bottom Layer w0.254: 96.562,83.27 96.562,83.481 97.536,84.455 ; 96.774,83.058 v1(97.155,83.058)
  other v1: 92.583,99.06
3V3: C4.1 C5.1 C6.1 P3.1 P4.1 P5.1 P6.1 R1.2 R2.1 R7.1 U1.1 U1.13 U1.19 U1.32 U1.48 U1.64 U2.2 U2.4 | length 51.5
  Top Layer w0.254: P3.1 80.812,58.079 82.423,59.69 82.423,67.437 82.445,67.459 81.241,68.663 79.673,68.663 v1(79.502,68.834)
  Bottom Layer w0.254: v1@90.932,79.248 90.805,79.375 90.805,81.534 90.424,81.915 90.424,88.265 90.805,88.646 v1(92.837,88.646) ; v1(97.917,86.868) v1(97.917,89.027) ; 105.664,90.043 106.045,89.662 110.871,89.662 108.839,87.63 108.839,83.947 106.807,81.915 v1(106.807,80.518)
  other v1: 90.868,79.311 81.153,80.899 58.293,87.122 69.082,88.43 92.075,88.519 105.283,89.373 91.313,90.17 105.283,91.313 59.991,94.361
  other v3: 80.645,87.503
+5: C2.1 C3.1 P1.1 P2.1 P7.1 P9.1 R8.1 SW2.A SW2.C U2.3 | length 153.1
  Top Layer w0.254: 78.613,71.628 78.613,71.12 79.375,70.358 82.931,70.358 83.522,69.767 84.048,69.767 84.271,69.544 R8.1 ; v1@78.74,72.136 85.09,72.136 ; v1(90.805,68.961) 91.313,68.453 91.313,67.691 91.567,67.437 91.567,55.626 93.078,54.115 93.998,54.115 94.171,53.942 P2.1 ; v1(105.537,78.359) 105.537,80.645 107.188,82.296 108.331,82.296 108.966,81.661 ; v1@110.998,82.804 115.176,86.982 115.176,87.854 115.349,88.027 P1.1
  Bottom Layer w0.254: 58.801,72.898 58.928,72.771 61.214,72.771 62.357,71.628 62.357,67.586 62.506,67.437 74.803,67.437 74.952,67.586 74.952,72.114 v1@76.222,72.114 ; v1(67.866,100.902) SW2.C ; v1(74.041,91.732) 75.527,91.732 76.073,91.186 76.073,72.263 v1@76.222,72.114 ; v1(78.613,72.136) 78.591,72.114 v1@76.222,72.114 ; v1(84.328,69.596) 84.328,70.59 84.477,70.739 86.36,70.739 87.058,70.04 ; 87.122,70.104 88.138,69.088 v1@90.678,69.088 ; v1(90.805,68.961) 97.282,68.961 99.758,71.438 ; v1(105.537,78.359) 105.156,77.978 105.156,74.698 105.007,74.549 102.87,74.549 99.758,71.438 ; v1@107.95,53.594 101.854,59.69 101.854,69.342 99.758,71.438
  other v1: 107.823,53.721 76.147,72.189 59.563,72.644 111.125,82.804 115.316,87.63 69.977,92.113 61.241,96.938 67.818,99.568 67.691,108.077
BAR30_SCL: P1.3 R1.1 U1.58 | length 27.3
  Top Layer w0.254: U1.58 95.762,85.447 101.106,90.791 103.117,92.802 R1.1 111.16,92.802 113.792,90.17 115.681,90.17 P1.3
  other v1: 100.965,90.932
BAR30_SDA: P1.2 R2.2 U1.59 | length 10.9
  Top Layer w0.254: R2.2 112.557,88.173 113.411,89.027 P1.2
  other v1: 93.472,85.852 105.41,88.138
  other v3: 94.361,85.979
BOOT0: R3.1 U1.60 | length 20.2
  Top Layer w0.254: R3.1 87.284,94.996 87.284,94.002 87.433,93.853 91.526,93.853 91.699,94.026 v1(95.885,94.026) ; 96.266,88.265 96.266,91.694
  Bottom Layer w0.254: v1@93.271,86.614 95.631,86.614 96.266,87.249 96.266,88.265 ; v1(95.885,94.026) 95.885,93.932 96.266,93.551 96.266,91.694
  other v1: 93.144,86.487 87.249,94.996
BOOT1: R4.1 U1.28 | length 14.7
  Top Layer w0.254: v1@79.121,85.598 v1(79.121,85.471) 79.121,84.725 80.868,82.978 81.519,82.978 U1.28
  Bottom Layer w0.254: v1(79.121,85.471) 79.187,85.537 79.187,88.458 83.185,92.456 83.185,93.091 82.931,93.345 v1(82.931,94.361)
ESC1: P8.2 U1.37 | length 31.5
  Top Layer w0.2: 85.217,73.174 85.217,77.564 85.4,77.747 U1.37
  Top Layer w0.254: P8.2 83.632,62.042 83.947,62.357 88.116,62.357 88.265,62.506 88.265,72.053 87.293,73.025 85.366,73.025 85.217,73.174
ESC2: P8.3 U1.38 | length 30.7
  Top Layer w0.2: 85.725,77.089 85.725,77.43 85.888,77.593 85.888,78.151 85.881,78.158 U1.38@85.881,79.097
  Top Layer w0.254: P8.3 84.632,61.518 84.963,61.849 88.624,61.849 88.773,61.998 88.773,72.263 87.376,73.66 85.974,73.66 85.698,73.936 85.698,77.062 85.725,77.089
ESC3: P8.4 U1.39 | length 30.2
  Top Layer w0.254: P8.4 85.632,61.192 85.781,61.341 89.027,61.341 89.281,61.595 89.281,72.561 87.674,74.168 86.487,74.168 86.206,74.449 86.206,76.852 86.233,76.879 86.233,77.045 86.389,77.201 86.389,77.957 86.369,77.977 86.369,79.066 U1.39
ESC4: P8.5 U1.40 | length 29.4
  Top Layer w0.2: 86.897,76.864 U1.40@86.897,79.097
  Top Layer w0.254: P8.5 86.632,60.561 86.904,60.833 89.535,60.833 89.789,61.087 89.789,72.771 87.884,74.676 86.89,74.676 86.741,74.825 86.741,76.708 86.897,76.864
GND: C1.1 C2.2 C3.2 C4.2 C5.2 C6.2 D1.1 DS1.2 DS2.2 J1.5 J1.6 J1.7 P1.4 P2.3 P3.6 P4.3 P5.3 P6.3 P7.4 P8.6 P9.4 P10.7 R6.1 R13.1 SW1.1 U1.12 U1.18 U1.31 U1.47 U1.63 U2.1 U3.11 U3.12
  other v1: 85.344,48.387 51.816,48.895 75.057,49.403 62.103,49.657 68.58,49.657 118.11,52.07 53.34,57.277 112.522,57.912 104.521,59.563 117.348,63.246 113.665,69.342 69.342,74.168 69.342,81.28 87.122,84.582 64.262,89.916 119.507,99.314 54.61,102.362 120.523,104.648 53.594,106.172 116.713,109.347 56.515,110.744 53.594,111.506 77.597,113.03 118.618,113.157 101.092,114.3
  other v2: 110.312,107.424
JETSON_RX: P9.3 U1.43 | length 37.2
  Top Layer w0.254: v1@90.932,76.962 92.075,76.962 96.266,72.771 96.266,64.262 104.521,56.007 109.601,56.007 109.935,55.673 P9.3
  Bottom Layer w0.254: 88.392,77.851 89.281,76.962 89.893,76.962 ; 89.939,77.008 v1@90.805,77.008
  other v1: 90.805,76.962
  other v3: 88.392,78.105
JETSON_TX: P9.2 U1.42 | length 37.5
  Top Layer w0.254: v1(90.667,76.327) 90.734,76.393 91.196,76.393 91.221,76.419 91.475,76.419 95.504,72.39 95.504,63.5 103.505,55.499 108.025,55.499 108.616,54.908 108.616,54.769 108.935,54.45 P9.2
  Bottom Layer w0.2: 87.884,77.597 v3(87.884,78.613)
  Bottom Layer w0.254: 87.884,77.597 89.154,76.327 v1(90.667,76.327)
NetD1_2: D1.2 R5.2 | length 5.4
  Top Layer w0.254: R5.2@73.533,69.469 73.533,64.25 D1.2
NetDS1_1: DS1.1 R7.2 | length 4.8
  Top Layer w0.254: DS1.1 78.302,64.459 R7.2
NetDS2_1: DS2.1 R8.2 | length 5.5
  Top Layer w0.254: R8.2 85.471,64.631 DS2.1
NetP5_2: P5.2 R3.2 | length 7
  Top Layer w0.254: R3.2 88.484,95.175 88.707,94.952 88.782,94.952 88.992,94.742 89.535,94.742 90.043,95.25 P5.2
NetP6_2: P6.2 R4.2 | length 7.5
  Top Layer w0.254: P6.2 80.137,95.885 80.667,95.355 81.61,95.355 81.689,95.434 R4.2
NetR10_1: R10.1
NetR11_2: R11.2
NetR13_2: R13.2 U3.14 | length 23.7
  Top Layer w0.254: R13.2@101.384,86.868 109.706,86.868 109.855,86.719 109.855,77.216 111.633,75.438 U3.14
NetR14_1: R14.1
NetR15_1: R15.1
NetR17_1: R17.1
NRST: C1.2 P3.4 SW1.2 U1.7 | length 80.8
  Top Layer w0.254: P3.4 64.032,62.762 74.549,73.279 74.549,75.311 78.359,79.121 v1@78.359,79.756 ; 80.645,92.964 83.82,92.964 ; U1.7 87.9,91.376 87.9,93.196 88.049,93.345 97.028,93.345 97.812,92.561 98.022,92.561 98.171,92.71 98.171,94.448 C1.2 97.877,94.742 96.923,94.742 96.774,94.891 96.774,104.191 SW1.2
  Bottom Layer w0.254: v1(78.232,79.756) 77.343,80.645 77.343,88.773 80.645,92.075 80.645,92.964 ; 83.853,92.964 86.995,92.964 87.884,92.075 87.884,90.678
  other v1: 87.884,91.376
POT: P4.2 U1.20 | length 23.4
  Top Layer w0.254: P4.2 58.689,86.152 78.405,86.152 79.2,86.947 U1.20
RS485_INPUT_N: P10.3 R12.1 R14.2 | length 10.3
  Top Layer w0.381: R14.2 107.379,66.484 107.379,64.637 R12.1 111.83,64.573 113.411,62.992 113.792,62.992 113.794,62.994 114.953,62.994 P10.3
RS485_INPUT_P: P10.2 R10.2 R12.2 | length 10.6
  Top Layer w0.381: R12.2 R10.2 112.614,60.925 113.792,62.103 P10.2
RS485_OUTPUT_N: P10.5 R16.1 R17.2 | length 13
  Top Layer w0.381: R16.1 107.475,72.83 108.018,72.83 108.966,71.882 R17.2 110.49,71.755 110.49,68.326 113.604,65.212 114.953,65.212 P10.5
RS485_OUTPUT_P: P10.4 R15.2 R16.2 | length 10.7
  Top Layer w0.381: R15.2 108.204,70.231 108.585,69.85 108.585,69.088 113.57,64.103 P10.4
RS485_RX: R9.1 U1.52
  other v1: 100.921,82.042
  other v4: 94.056,82.415
RS485_TX: U1.51 U3.13
  other v1: 113.792,76.708 93.853,81.788
SERVO_PWM: P2.2 U1.44 | length 28.4
  Top Layer w0.2: 88.646,76.962 88.9,77.216 U1.44
  Top Layer w0.254: 88.646,76.962 88.646,76.2 94.615,70.231 94.615,55.753 95.171,55.197 P2.2
SONAR_RX: P7.3 U1.30 | length 28.6
  Top Layer w0.254: P7.3 69.485,70.755 72.644,73.914 72.644,78.232 76.327,81.915 80.391,81.915
SONAR_TX: P7.2 U1.29 | length 28.3
  Top Layer w0.254: P7.2 69.342,71.755 71.247,73.66 71.247,77.724 75.978,82.455 80.399,82.455
SWCLK: P3.2 U1.49 | length 46
  Top Layer w0.254: P3.2 70.032,58.904 70.54,59.412 71.517,59.412 73.192,61.087 74.168,61.087 75.819,62.738 75.819,66.929 77.216,68.326 77.216,74.654 77.365,74.803 83.947,74.803 v1@84.074,74.676
  Bottom Layer w0.254: v1@84.328,74.549 93.98,74.549 95.123,75.692 95.123,80.032 94.764,80.391 94.412,80.743 v1(93.599,80.743) ; 92.837,80.899 92.927,80.809 v1@93.509,80.809 ; v1@93.509,80.809 93.533,80.809 v1(93.599,80.743) ; v1@93.509,80.809 93.575,80.743 v1(93.599,80.743)
  other v1: 84.328,74.676
SWDIO: P3.3 U1.46 | length 58.7
  Top Layer w0.254: U1.46 89.931,79.066 89.931,78.415 90.703,77.643 94.061,77.643 98.298,73.406 98.298,64.135 v1@98.171,64.008 ; 95.631,61.976 97.663,59.944
  Bottom Layer w0.254: v1(67.183,58.42) 68.58,59.817 68.58,60.176 ; 68.729,60.325 94.615,60.325 96.542,58.398 ; 96.012,61.976 v1(98.171,64.135) ; 96.752,58.398 97.663,59.309
  other v1: 89.916,78.232
SWO: P3.5 U1.55 | length 75.3
  Top Layer w0.254: U1.55 96.901,83.947 97.028,83.82 99.592,83.82 99.618,83.846 103.098,83.846 103.759,83.185 103.759,71.501 100.965,68.707 v1@100.965,61.722
  Bottom Layer w0.254: 60.96,58.547 63.373,60.96 100.838,60.96 100.987,61.109 v1@100.987,61.319
  other v1: 100.965,61.531
USER_BUTTON: R6.2 SW2.B SW2.D U1.14 | length 27.2
  Top Layer w0.254: SW2.D SW2.B 73.866,96.06 76.2,93.726 77.956,93.726 78.105,93.577 R6.2 78.937,92.894 79.629,92.202 84.251,92.202 84.4,92.053 U1.14
USER_LED: R5.1 U1.11 | length 45.8
  Top Layer w0.254: v1(85.598,94.615) 85.9,94.313 U1.11
  Bottom Layer w0.254: 72.263,69.596 72.263,80.137 73.279,81.153 73.279,95.504 75.311,97.536 84.074,97.536 85.471,96.139 ; v1(85.598,94.615) 85.598,96.012
VBUS: J1.1
  other v2: 107.112,107.424
VDD: P8.1
pads on no net: J1.2 J1.3 J1.4 P1.5 P1.6 P1.7 P1.8 P1.MP1 P1.MP2 P2.4 P2.5 P2.6 P2.7 P2.8 P2.MP1 P2.MP2 P3.MP1 P3.MP2 P4.4 P4.5 P4.6 P4.7 P4.8 P4.MP1 P4.MP2 P7.5 P7.6 P7.7 P7.8 P7.MP1 P7.MP2 P8.7 P8.8 P8.MP1 P8.MP2 P9.5 P9.6 P9.7 P9.8 P9.MP1 P9.MP2 P10.1 P10.6 P10.8 P10.MP1 P10.MP2 U1.2 U1.3 U1.4 U1.5 U1.6 U1.8 U1.9 U1.10 U1.15 U1.16 U1.17 U1.21 U1.22 U1.23 U1.24 U1.25 U1.26 U1.27 U1.33 U1.34 U1.35 U1.36 U1.41 U1.45 U1.50 U1.53 U1.54 U1.56 U1.57 U1.61 U1.62 U3.1 U3.2 U3.3 U3.4 U3.5 U3.6 U3.7 U3.8 U3.9 U3.10
copper on no net: | length 16.8
  Top Layer w0.254: 85.09,72.136 v1@87.249,69.977 ; v1(97.663,59.309) 97.663,59.944 ; 106.807,74.676 106.045,75.438 106.045,76.581 106.807,77.343 106.807,80.518
  Bottom Layer w0.254: 50.927,115.824 51.004,115.747 51.004,115.316 51.153,115.316 51.562,115.316 ; 68.58,60.176 68.729,60.325 ; 85.471,96.139 85.598,96.012 ; 88.392,77.851 88.392,78.359 ; 89.893,76.962 89.939,77.008 ; 92.837,86.487 93.144,86.487 93.271,86.614 ; v1@95.631,61.976 v1@96.012,61.976 ; 96.542,58.398 96.752,58.398 ; 96.562,83.27 96.774,83.058 ; 100.965,61.722 100.965,61.341 100.987,61.319 ; v1(108.839,81.661) 109.982,81.661 111.125,82.804
  other v1: 95.822,61.976 87.122,70.104 97.536,84.455 96.266,91.694 80.899,92.964
  other v2: 107.912,106.224 109.512,106.224 108.712,107.424

## Polygon pours and split planes (outlines as drawn)
GND on Top Layer "GND_L01_P019" (solid, pour order 19): 51.308,115.824 51.562,115.57 121.793,115.57 121.793,47.625 121.285,47.117 121.158,47.244 51.308,47.244 51.308,115.062 51.435,115.189
RS485_RX on Top Layer "RS485_RX_L01_P017" (solid, pour order 17): 92.456,82.677 92.456,82.296 98.933,82.042 99.949,81.534 102.362,81.534 102.108,81.788 102.108,82.55 92.964,82.55 92.623,82.891 92.623,82.574
+5 on Top Layer "+5_L01_P016" (solid, pour order 16): 68.834,100.203 68.834,102.108 66.04,102.108 66.04,100.076 64.262,98.298 59.563,98.298 59.563,96.52 59.69,96.393 66.802,96.393 66.802,94.234 69.342,91.694 73.533,91.694 73.914,91.313 74.93,91.313 74.93,92.075 73.914,93.091 69.85,93.091 69.85,100.965 68.707,102.108
3V3 on Top Layer "3V3_L01_P015" (solid, pour order 15): 61.849,95.631 61.595,95.885 59.182,95.885 59.182,93.091 57.785,91.694 57.785,86.614 67.691,86.614 68.961,87.884 79.438,87.63 79.756,87.503 80.391,87.249 82.677,87.249 82.677,87.63 82.55,87.757 80.264,87.757 78.994,89.027 68.834,89.027 67.183,87.376 58.42,87.376 58.293,87.503 59.055,88.265 59.309,92.837 61.595,95.377 61.849,95.377
3V3 on Top Layer "3V3_L01_P009" (solid, pour order 9): 54.61,96.52 54.356,96.774 53.34,96.774 53.34,93.599 53.721,93.218 58.928,93.218 58.928,93.599 59.69,94.361 61.849,94.361 61.849,95.758 61.595,96.012 61.468,95.885 55.118,95.885 54.229,96.774
GND on Bottom Layer "NONET_L02_P022" (solid, pour order 22): 51.611,115.951 121.158,115.951 121.666,115.443 121.666,47.371 51.562,47.371 51.181,47.752 51.258,47.829 51.258,116.167
3V3 on Bottom Layer "3V3_L02_P006" (solid, pour order 6): 93.345,101.092 91.694,101.092 91.44,100.838 91.123,93.154 90.678,92.075 90.678,89.154 91.44,89.154 91.694,88.9 91.567,88.773 91.567,88.138 94.615,88.138 95.377,88.9 106.426,88.9 106.426,91.821 106.172,92.075 103.886,92.075 103.886,90.424 103.124,89.662 91.821,89.662 91.821,92.583 93.345,94.107
3V3 on Bottom Layer "3V3_L02_P018" (solid, pour order 18): 81.788,81.153 80.518,81.153 80.518,71.501 78.994,69.977 78.994,66.802 79.248,67.056 80.137,67.056 80.137,67.818 81.788,69.469
RS485_TX on Bottom Layer "RS485_TX_L02_P002" (solid, pour order 2): 93.091,81.661 98.425,81.661 100.584,79.502 112.903,79.502 112.903,76.581 113.411,76.073 116.713,76.073 116.713,77.089 116.459,77.343 113.284,77.343 113.284,79.629 112.776,80.137 100.838,80.137 98.933,82.042 92.71,82.042 92.837,81.915 92.964,81.915 92.964,81.788
BAR30_SDA on Bottom Layer "BAR30_SDA_L02_P004" (solid, pour order 4): 92.329,86.106 92.329,85.979 92.583,85.725 98.806,85.725 100.838,83.693 106.934,83.693 106.934,87.63 105.791,88.773 104.521,88.773 104.521,84.836 104.394,84.709 101.092,84.709 99.568,86.233 99.568,86.36 95.504,86.36 95.123,86.233

## Keep-outs
Top Layer:
  lines w0.1: 60.96,95.885 61.595,95.885 61.849,95.631 61.849,94.361
Bottom Layer:
  lines w0.1: 79.121,85.471 79.121,85.598
Keep-Out Layer:
  lines w0.1: 103.214,47.388 121.793,47.388 121.793,115.57 104.87,115.57 67.85,115.57 51.435,115.57 51.435,64.809 51.435,47.376 62.99,47.376 103.634,47.366